# Altium PCB TinyDVR_Slave_WildWolf.PcbDoc
Units mil, origin at the board's own origin, x right, y up, seen from the top; angles counter-clockwise.
Board outline 1056 x 1540 mil, 2 copper layers (Top Layer, Bottom Layer); 25 components, 22 nets, 91 pads, 75 vias.
Unrouted connection lines stored in the file: 1.
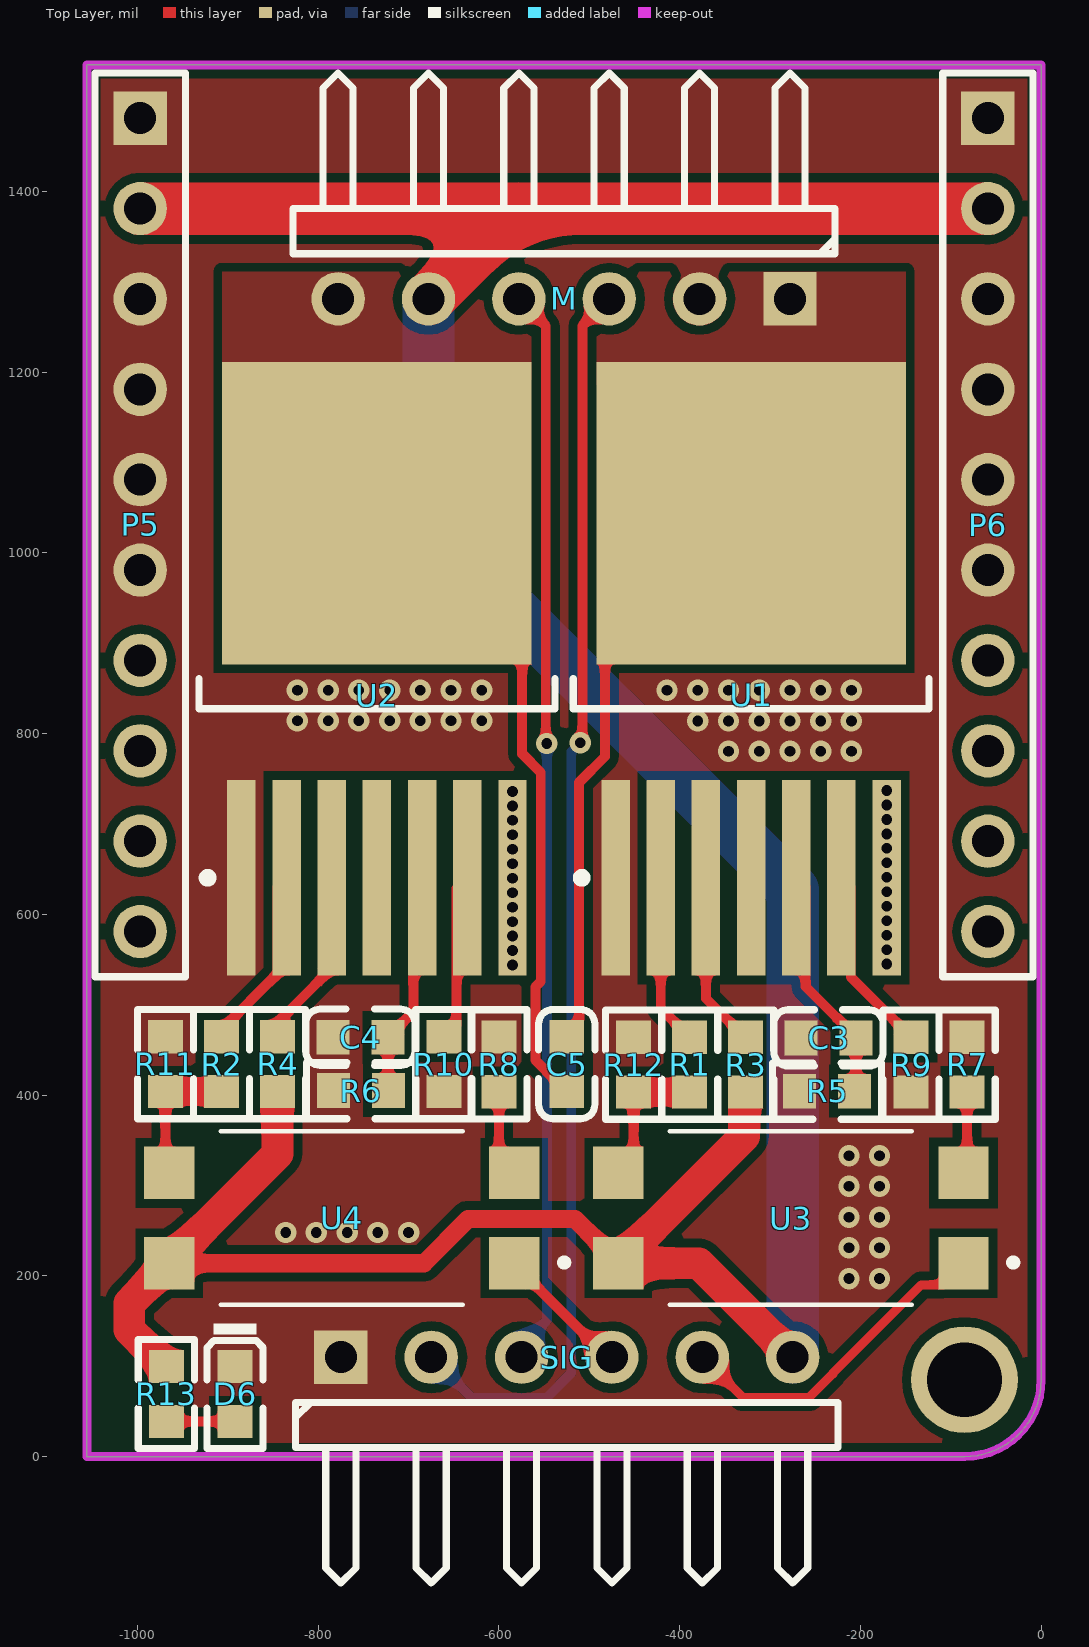
[diagram p0: Top Layer view]
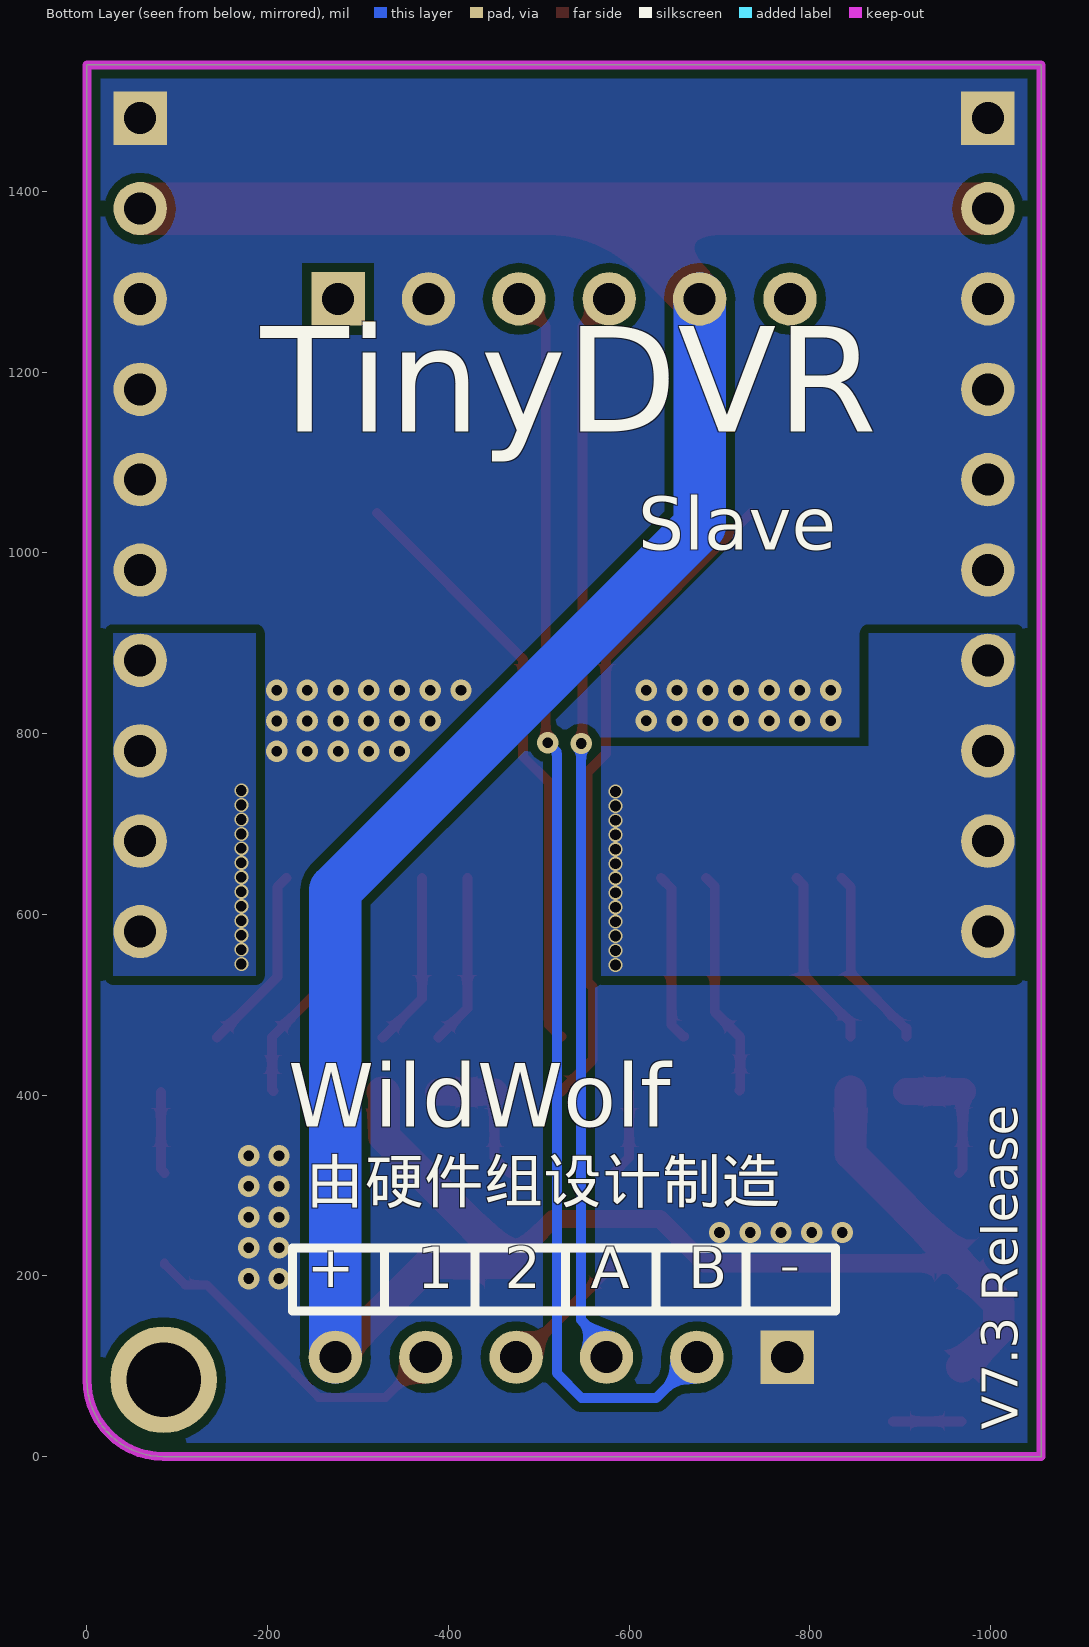
[diagram p1: Bottom Layer view, seen from below]
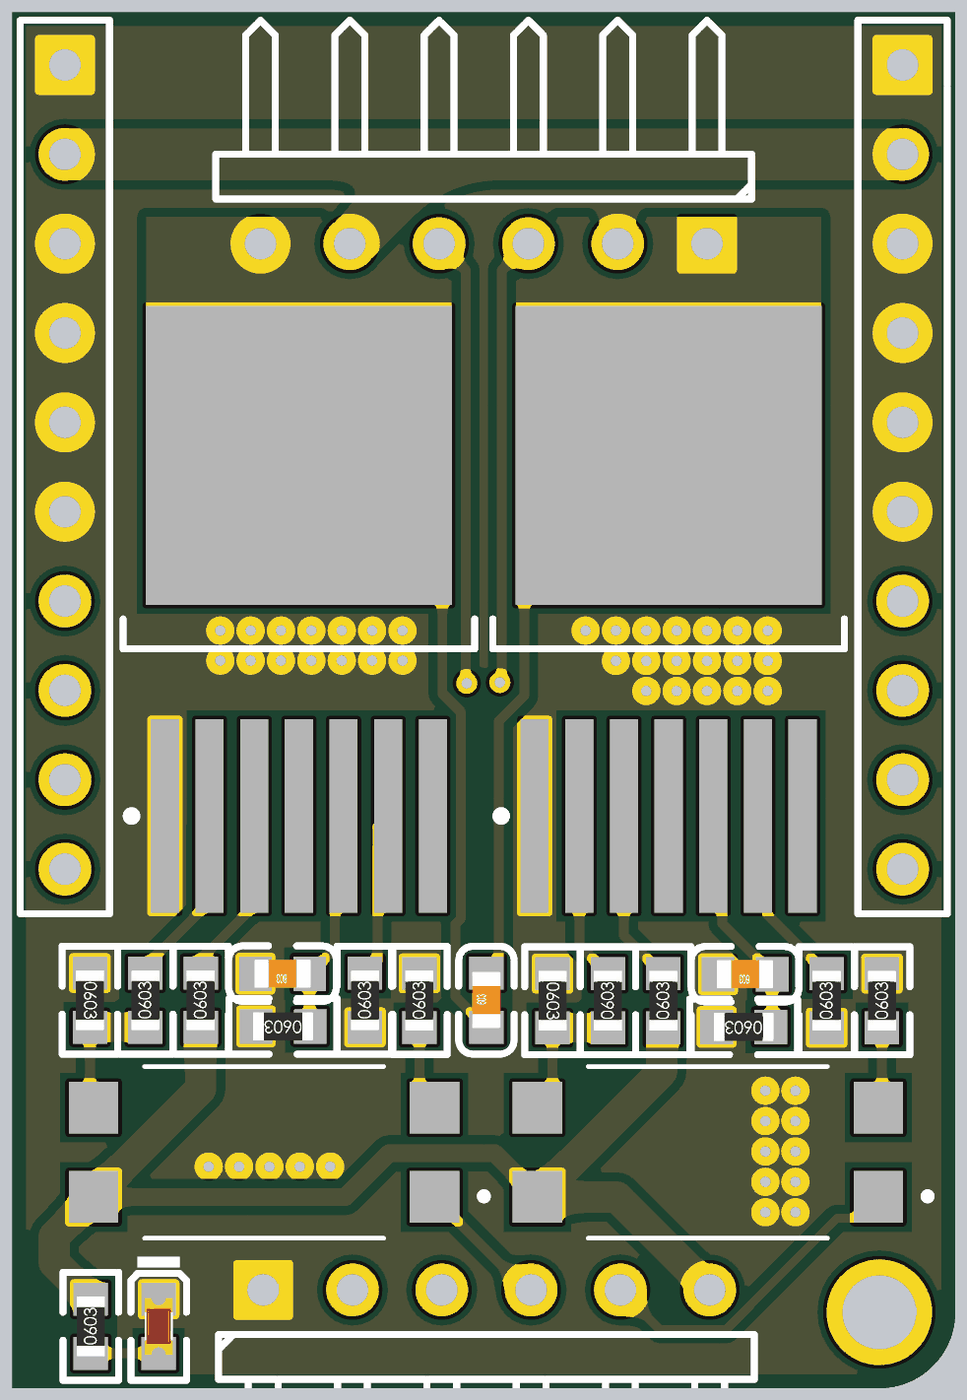
[diagram p2: 3D render of the assembled board from above, using the file's embedded part models]

## Layer stack, top to bottom
Top Solder: solder mask 0.4, Solder Resist, Dk 3.5
Top Layer: signal copper 1.4
Dielectric 1: dielectric 12.6, FR-4, Dk 4.8
Bottom Layer: signal copper 1.4
Bottom Solder: solder mask 0.4, Solder Resist, Dk 3.5

## Board outline
-1056,0 -1056,1540 0,1540 0,85 cw(c-85,85) -85,0

## Design rules (kind name [scope] priority, off if disabled: settings)
Clearance [All] p1: gap=10 ignorepadtopadclearanceinfootprint=FALSE except(0: Arc-Hole Track-Hole SMDPad-Hole THPad-Hole Via-Hole Fill-Hole Poly-Hole Region-Hole Text-Hole)
PlaneConnect [All] p1: planeconnectstyle=Direct reliefexpansion=20 reliefentries=4 reliefconductorwidth=10 reliefairgap=10
PolygonConnect [All] p1: connectstyle=Direct reliefconductorwidth=10 reliefentries=4 polygonreliefangle="90 Angle" airgapwidth=10
RoutingVias [All] p1: holewidth=11.81 width=23.62 viastyle="Through Hole" minholewidth=11.81 minwidth=23.62 maxholewidth=11.81 maxwidth=23.62
SolderMaskExpansion [All] p1: expansion=4 istentingtop=FALSE
Width [All] p1: maxlimit=100 minlimit=10 preferedwidth=10
29 further rules are at their usual default settings.

## Components (designator, comment, footprint, x,y, rotation, side; value= is the part's Value field where it differs from the comment)
C3 "100nF (104) 10% 50V" 0603_C -235.31,463.37 r180 top
C4 "100nF (104) 10% 50V" 0603_C -753.31,464 r180 top
C5 "22pF (220) 5% 50V" 0603_C -525,434.31 r90 top
D6 "红灯 0603" 0603_LED_S1 -892,69.32 r270 top
M "Header 6H" HDR1X6H -278,1281 r180 top
P5 "Header 10" HDR1X10 -997,1481 r270 top
P6 "Header 10" HDR1X10 -59,1481 r270 top
R1 "10KΩ (1002) ±1%" 0603_R -389,433.68 r90 top
R2 "10KΩ (1002) ±1%" 0603_R -907,434.31 r90 top
R3 "10KΩ (1002) ±1%" 0603_R -327,433.68 r90 top
R4 "10KΩ (1002) ±1%" 0603_R -845,434.31 r90 top
R5 "1KΩ (1001) ±1%" 0603_R -237,404.35 r180 top
R6 "1KΩ (1001) ±1%" 0603_R -752.68,404.98 r180 top
R7 "1KΩ (1001) ±1%" 0603_R -82,433.68 r90 top
R8 "1KΩ (1001) ±1%" 0603_R -600,434 r90 top
R9 "2KΩ (2001) ±1%" 0603_R -144,433.68 r90 top
R10 "2KΩ (2001) ±1%" 0603_R -661,434.31 r90 top
R11 "2KΩ (2001) ±1%" 0603_R -969,434.31 r270 top
R12 "2KΩ (2001) ±1%" 0603_R -451,433.68 r270 top
R13 "4.7k" 0603_R -968,69.31 r90 top
SIG "Header 6H" HDR1X6H -775,110 r0 top
U1 "BTN7971" DPAK127P1615X127-8N -321,870.77 r90 top
U2 "BTN7971" DPAK127P1615X127-8N -735,870.77 r90 top
U3 "EL2501" *SOIC254P1030X390-4N_EL817S1(A)(TU)-V -277.06,264 r180 top
U4 "EL2501" *SOIC254P1030X390-4N_EL817S1(A)(TU)-V -773.94,264 r180 top

## Footprints (in the part's own frame and the unit in brackets; to place one, negate y for a bottom-side part, rotate by r counter-clockwise, add the part's x,y. Pads: shape width x height; smd on the part's side, far side on the other; paste and mask are expansions set on the pad)
0603_C [mm]
  rect 0.93x0.98 smd: 1(-0.77,0) 2(0.77,0)
  silkscreen extent -1.53,-0.79 1.54,0.79, body extent -0.8,-0.4 0.8,0.4, height 0.3
0603_LED_S1 [mm]
  rect 0.93x0.98 smd: A(0.77,0) K(-0.77,0)
  silkscreen extent -1.98,-0.79 1.54,0.79, body extent -0.8,-0.4 0.8,0.4, height 0.6
0603_R [mm]
  rect 0.93x0.98 smd: 1(-0.77,0) 2(0.77,0)
  silkscreen extent -1.53,-0.79 1.54,0.79, body extent -0.85,-0.4 0.85,0.4, height 0.56
*SOIC254P1030X390-4N_EL817S1(A)(TU)-V [mm]
  rect 1.41x1.47 smd: 1(-4.85,1.27) 2(-4.85,-1.27) 3(4.85,-1.27) 4(4.85,1.27)
  silkscreen extent -6.35,-2.44 3.4,2.44
DPAK127P1615X127-8N [mm] "TO, 8-Pads, Body 7.23x8.36mm (max), IPC Medium Density"
  rect 5.5x0.8 smd: 1(-5.85,3.81) 2(-5.85,2.54) 3(-5.85,1.27) 4(-5.85,0) 5(-5.85,-1.27) 6(-5.85,-2.54) 7(-5.85,-3.81)
  rect 8.5x8.7 smd: 8(4.4,0)
  silkscreen extent -5.97,-5 -0.25,5, body extent -1.1,-5 7.15,5, height 1.27
HDR1X6H [mm] "Connector; Header; 6 Position; Right Angle"
  rect 1.5x1.5 hole 0.9: 1(0,0)
  round 1.5 hole 0.9: 2(2.54,0) 3(5.08,0) 4(7.62,0) 5(10.16,0) 6(12.7,0)
  silkscreen extent -1.27,-6.35 13.97,-1.27
HDR1X10 [mm] "Connector; Header; 10 Position"
  rect 1.5x1.5 hole 0.9: 1(0,0)
  round 1.5 hole 0.9: 2(2.54,0) 3(5.08,0) 4(7.62,0) 5(10.16,0) 6(12.7,0) 7(15.24,0) 8(17.78,0) 9(20.32,0) 10(22.86,0)
  silkscreen extent -1.27,-1.27 24.13,1.27

## Part data
C3 C4: library part "0603 100nF (104) 10% 50V", "贴片电容", Package=0603, SuppliersPartNumber=C14663, ComponentLink1Description=供?, ComponentLink1URL=http://www.szlcsc.com/product/details_15331.html, Supplier=LC
C5: library part "0603 22pF (220) 5% 50V", "贴片电容", Package=0603, SuppliersPartNumber=C1653, ComponentLink1Description=供?, ComponentLink1URL=http://www.szlcsc.com/product/details_2005.html, Supplier=LC
D6: library part "0603 红灯", "发光二极管", Package=0603, SuppliersPartNumber=C2286, ComponentLink1Description=供应, ComponentLink1URL=http://www.szlcsc.com/product/details_2659.html, Supplier=LC
M SIG: "Header, 6-Pin, Right Angle", LatestRevisionDate=17-Jul-2002, LatestRevisionNote="Re-released for DXP Platform.", Publisher="Altium Limited"
P5 P6: "Header, 10-Pin", LatestRevisionDate=17-Jul-2002, LatestRevisionNote="Re-released for DXP Platform.", Publisher="Altium Limited"
R1 R2 R3 R4: library part "0603 10KΩ (1002) 1%", "贴片电阻", Package=0603, SuppliersPartNumber=C25804, ComponentLink1Description=供?, ComponentLink1URL=http://www.szlcsc.com/product/details_26547.html, Supplier=LC
R5 R6 R7 R8: library part "0603 1KΩ (1001) 1%", "贴片电阻", Package=0603, SuppliersPartNumber=C21190, ComponentLink1Description=供?, ComponentLink1URL=http://www.szlcsc.com/product/details_21904.html, Supplier=LC
R9 R10 R11 R12: library part "0603 2KΩ (2001) 1%", "贴片电阻", Package=0603, SuppliersPartNumber=C22975, ComponentLink1Description=供?, ComponentLink1URL=http://www.szlcsc.com/product/details_23702.html, Supplier=LC
R13: library part "0603 470Ω (4700) 1%", "贴片电阻", Package=0603, SuppliersPartNumber=C23179, ComponentLink1Description=供应, ComponentLink1URL=http://www.szlcsc.com/product/details_23906.html, Supplier=LC
U3 U4: library part EL817S1(A)(TU)-V, "Optoisoltr 5kv Transistor 4-Smd", Package="SMD-4 Everlight Electronics", Availability=Unavailable, MF="Everlight Electronics", MP=EL817S1_A__TU_-V, Price=None, SnapEDA_Link=https://www.snapeda.com/parts/EL817S1%28A%29%28TU%29-V/Everlight%20Electronics%20Co%20Ltd/view-part/?ref=snap

## Free pads (board coordinates)
  round 118.11 hole 82.68: 6(-85,85)

## Via types
v1: diameter 23.62, hole 11.81, Top Layer to Bottom Layer, 49 vias
v2: diameter 15.75, hole 11.81, Top Layer to Bottom Layer, 26 vias

## Nets (pads, with @x,y where several pads share a name; then routed paths per layer and width w, separated by ;. In a path a pad name is that pad's centre, name@x,y a point inside that pad or via, vN(x,y) a via of type N, cw(c..) or ccw(c..) an arc to the next point about the centre after c; other vN are vias at no path point)
5VOUT: M.5 P5.2 P6.2 R3.1 R4.1 R13.2 SIG.6 U3.4 U4.4 | length 3828
  Top Layer w20: U4.4 -683,214 -634.06,262.94 -515.76,262.94 -468,215.18 U3.4
  Top Layer w35: R13.2 -1009,140.63 -1009,169.89 U4.4 -964.89,215.18 -845,335.07 R4.1 ; U3.4 -379,214 SIG.6 ; U3.4@-468,215.18 -328.79,354.39 -328.79,402.56 -327.98,403.37 R3.1
  Top Layer w58: P5.2 -578,1381 ; M.5 -578,1381 ; P6.2 -578,1381
  Bottom Layer w58: M.5 -678,1029.86 -275,626.86 SIG.6
ENCA: M.4 SIG.3 | length 1195.4
  Top Layer w11: M.4 -548.24,1251.24 -548.24,790.24 v1(-547,789)
  Bottom Layer w11: SIG.3 -575,123 -547,151 v1(-547,789)
ENCB: M.3 SIG.2 | length 1391
  Top Layer w11: v1(-510,790) -507.76,792.24 -507.76,1251.24 M.3
  Bottom Layer w11: SIG.2 -629.97,64.97 -547.47,64.97 -520.03,92.42 -520.03,777.35 -519.69,777.69 -519.69,780.31 v1(-510,790)
GND: C3.2 C4.2 D6.K M.2 P5.1 P5.3 P5.4 P5.5 P5.6 P6.1 P6.3 P6.4 P6.5 P6.6 R5.2 R6.2 R7.2 R8.2 R9.1 R10.1 R11.1 R12.1 SIG.1 U1.1 U2.1
  other v1: -212.65,197 -179,197 -212.65,231 -179,231 -836,248 -802,248 -768,248 -734,248 -700,248 -212.65,265 -179,265 -212.65,299 -179,299 -212.65,333 -179,333 -346,780.35 -312,780.35 -278,780.35 -244,780.35 -210,780.35 -823,814.35 -789,814.35 -755,814.35 -721,814.35 -687,814.35 -653,814.35 -619,814.35 -380,814 -346,814 -312,814 -278,814 -244,814 -210,814 -823,848 -789,848 -755,848 -721,848 -687,848 -653,848 -619,848 -414,848 -380,848 -346,848 -312,848 -278,848 -244,848 -210,848
IN1: SIG.5 U3.1 | length 370
  Top Layer w10: SIG.5 -330.47,65.47 -256.56,65.47 -230.47,91.56 -230.47,92.26 -132.67,190.06 -108.87,190.06 -86.11,212.82 U3.1
IN2: SIG.4 U4.1 | length 151.8
  Top Layer w11: U4.1 -583,212.82 -480.18,110 SIG.4
M+: C5.2 M.1 U1.8 | length 664.4
  Top Layer w11: C5.2 -524.02,464.63 -511.21,477.44 -511.21,746.18 -482.69,774.7 -482.69,882.31 U1.8
M-: C5.1 M.6 U2.8 | length 732
  Top Layer w11: U2.8 -574.31,883.31 -574.31,777.69 -553.75,757.13 -553.75,525.77 -559.79,519.73 -559.79,438.79 C5.1
NetC3_1: C3.1 R5.1 U1.5 | length 264.1
  Top Layer w11: U1.5 -260.75,630.21 -260.75,520.11 -205,464.35 C3.1 -205,406.04 R5.1
NetC4_1: C4.1 R6.1 U2.5 | length 251.5
  Top Layer w11: R6.1 -723,405.61 C4.1 -694.77,492.23 -694.77,630.68 U2.5
NetD6_A: D6.A R13.1 | length 76
  Top Layer w11: R13.1 D6.A
NetR1_1: R1.1 R12.2 U3.3 | length 158.4
  Top Layer w11: U3.3 -451,331 R12.2
  Top Layer w30: R12.2 R1.1
NetR1_2: R1.2 U1.2 | length 189.7
  Top Layer w11: U1.2 -421,496 R1.2
NetR2_1: R2.1 R11.2 U4.3 | length 153.7
  Top Layer w11: R11.2 -969,318.11 U4.3
  Top Layer w30: R11.2 R2.1
NetR2_2: R2.2 U2.2 | length 207.1
  Top Layer w11: R2.2 -907,474 -906.26,473.26 -845.25,534.27 -845.25,630.21 U2.2
NetR3_2: R3.2 U1.3 | length 195.3
  Top Layer w11: U1.3 -371,507.02 -327.98,464 R3.2
NetR4_2: R4.2 U2.3 | length 200.7
  Top Layer w11: R4.2 -845,480.27 -792.96,532.32 -792.96,632.5 U2.3
NetR7_1: R7.1 U3.2 | length 91.1
  Top Layer w11: U3.2 -82,318.11 R7.1
NetR8_1: R8.1 U4.2 | length 96.7
  Top Layer w11: R8.1 -600,331 U4.2
NetR9_2: R9.2 U1.6 | length 208.4
  Top Layer w11: U1.6 -210.75,630.21 -210.75,530.75 R9.2
NetR10_2: R10.2 U2.6 | length 187.2
  Top Layer w11: R10.2 -660.02,464.63 -647,477.65 -647,628.46 U2.6
VCC: P5.7 P5.8 P5.9 P5.10 P6.7 P6.8 P6.9 P6.10 U1.7 U2.7
  other v2: -585,544 -171,545 -585,560 -171,561 -585,576 -171,577 -585,592 -171,593 -585,608 -171,609 -585,624 -171,625 -585,640 -171,641 -585,656 -171,657 -585,672 -171,673 -585,688 -171,689 -585,704 -171,705 -585,720 -171,721 -585,736 -171,737
pads on no net: U1.4 U2.4

## Polygon pours and split planes (outlines as drawn)
GND on Top Layer "GND_L01_P052" (solid, remove dead copper, pour order 52): -1321,2033 402,2033 421,2014 404,1997 404,-296 -1454,-296
no net on Top Layer "NONET_L01_P044" (solid, remove dead copper, pour order 44): -1027,1411
M+ on Top Layer "M+_L01_P030" (solid, remove dead copper, pour order 30): -150,1311 -150,1186 -492,1186 -492,1311
M- on Top Layer "M-_L01_P026" (solid, remove dead copper, pour order 26): -563.98,1311 -563.98,1191 -905.98,1191 -905.98,1311
GND on Bottom Layer "GND_L02_P050" (solid, remove dead copper, pour order 50): -1309,2046 -1304,2041 416,2041 416,-289 392,-313 344,-265 -1457,-265
VCC on Bottom Layer "VCC_L02_P042" (solid, remove dead copper, pour order 42): -865,532 -1027,532 -1027,911 -865,911
VCC on Bottom Layer "VCC_L02_P034" (solid, remove dead copper, pour order 34): -29,532 -187,532 -187,911 -29,911
VCC on Bottom Layer "VCC_L02_P032" (solid, pour order 32): -569,532 -989,532 -989,786 -569,786

## Keep-outs
Keep-Out Layer:
  the board outline again, w10

## Silkscreen, mask and mechanical layers (free items; w line width, h text height)
Bottom Overlay:
  lines w10: -729.57,161 -729.57,231 ; -629.57,161 -629.57,231 ; -529.57,161 -529.57,231 ; -429.57,161 -429.57,231 ; -329.57,161 -329.57,231 ; -828.43,161 -227.57,161 -227.57,231 -828.43,231 -828.43,161
  text "TinyDVR" at -192.65,1095.73 h200
  text "Slave" at -610,984 h100
  text "WildWolf" at -223,342 h120
  text "由硬件组设计制造" at -241.74,265.28 h82
  text "-" at -789.57,176 h78.74
  text "+" at -296.57,172 h78.74
  text "B" at -665.57,171 h78.74
  text "A" at -557.57,171 h78.74
  text "2" at -462.57,171 h78.74
  text "1" at -365.57,171 h78.74
  text "V7.3 Release" at -1030,30 h40 r270
Mechanical 1:
  the board outline again, w10